# Altium PCB M1-Test-Board.PcbDoc (part 2 of 5)
Units mil, origin at the board's own origin, x right, y up, seen from the top; angles counter-clockwise.
Board outline 3977 x 5000 mil, 4 copper layers (Top, GND Layer 2, Power Layer 3, Bottom), stack 60 mil thick; 191 components, 124 nets, 579 pads, 189 vias.
Unrouted connection lines stored in the file: 80.
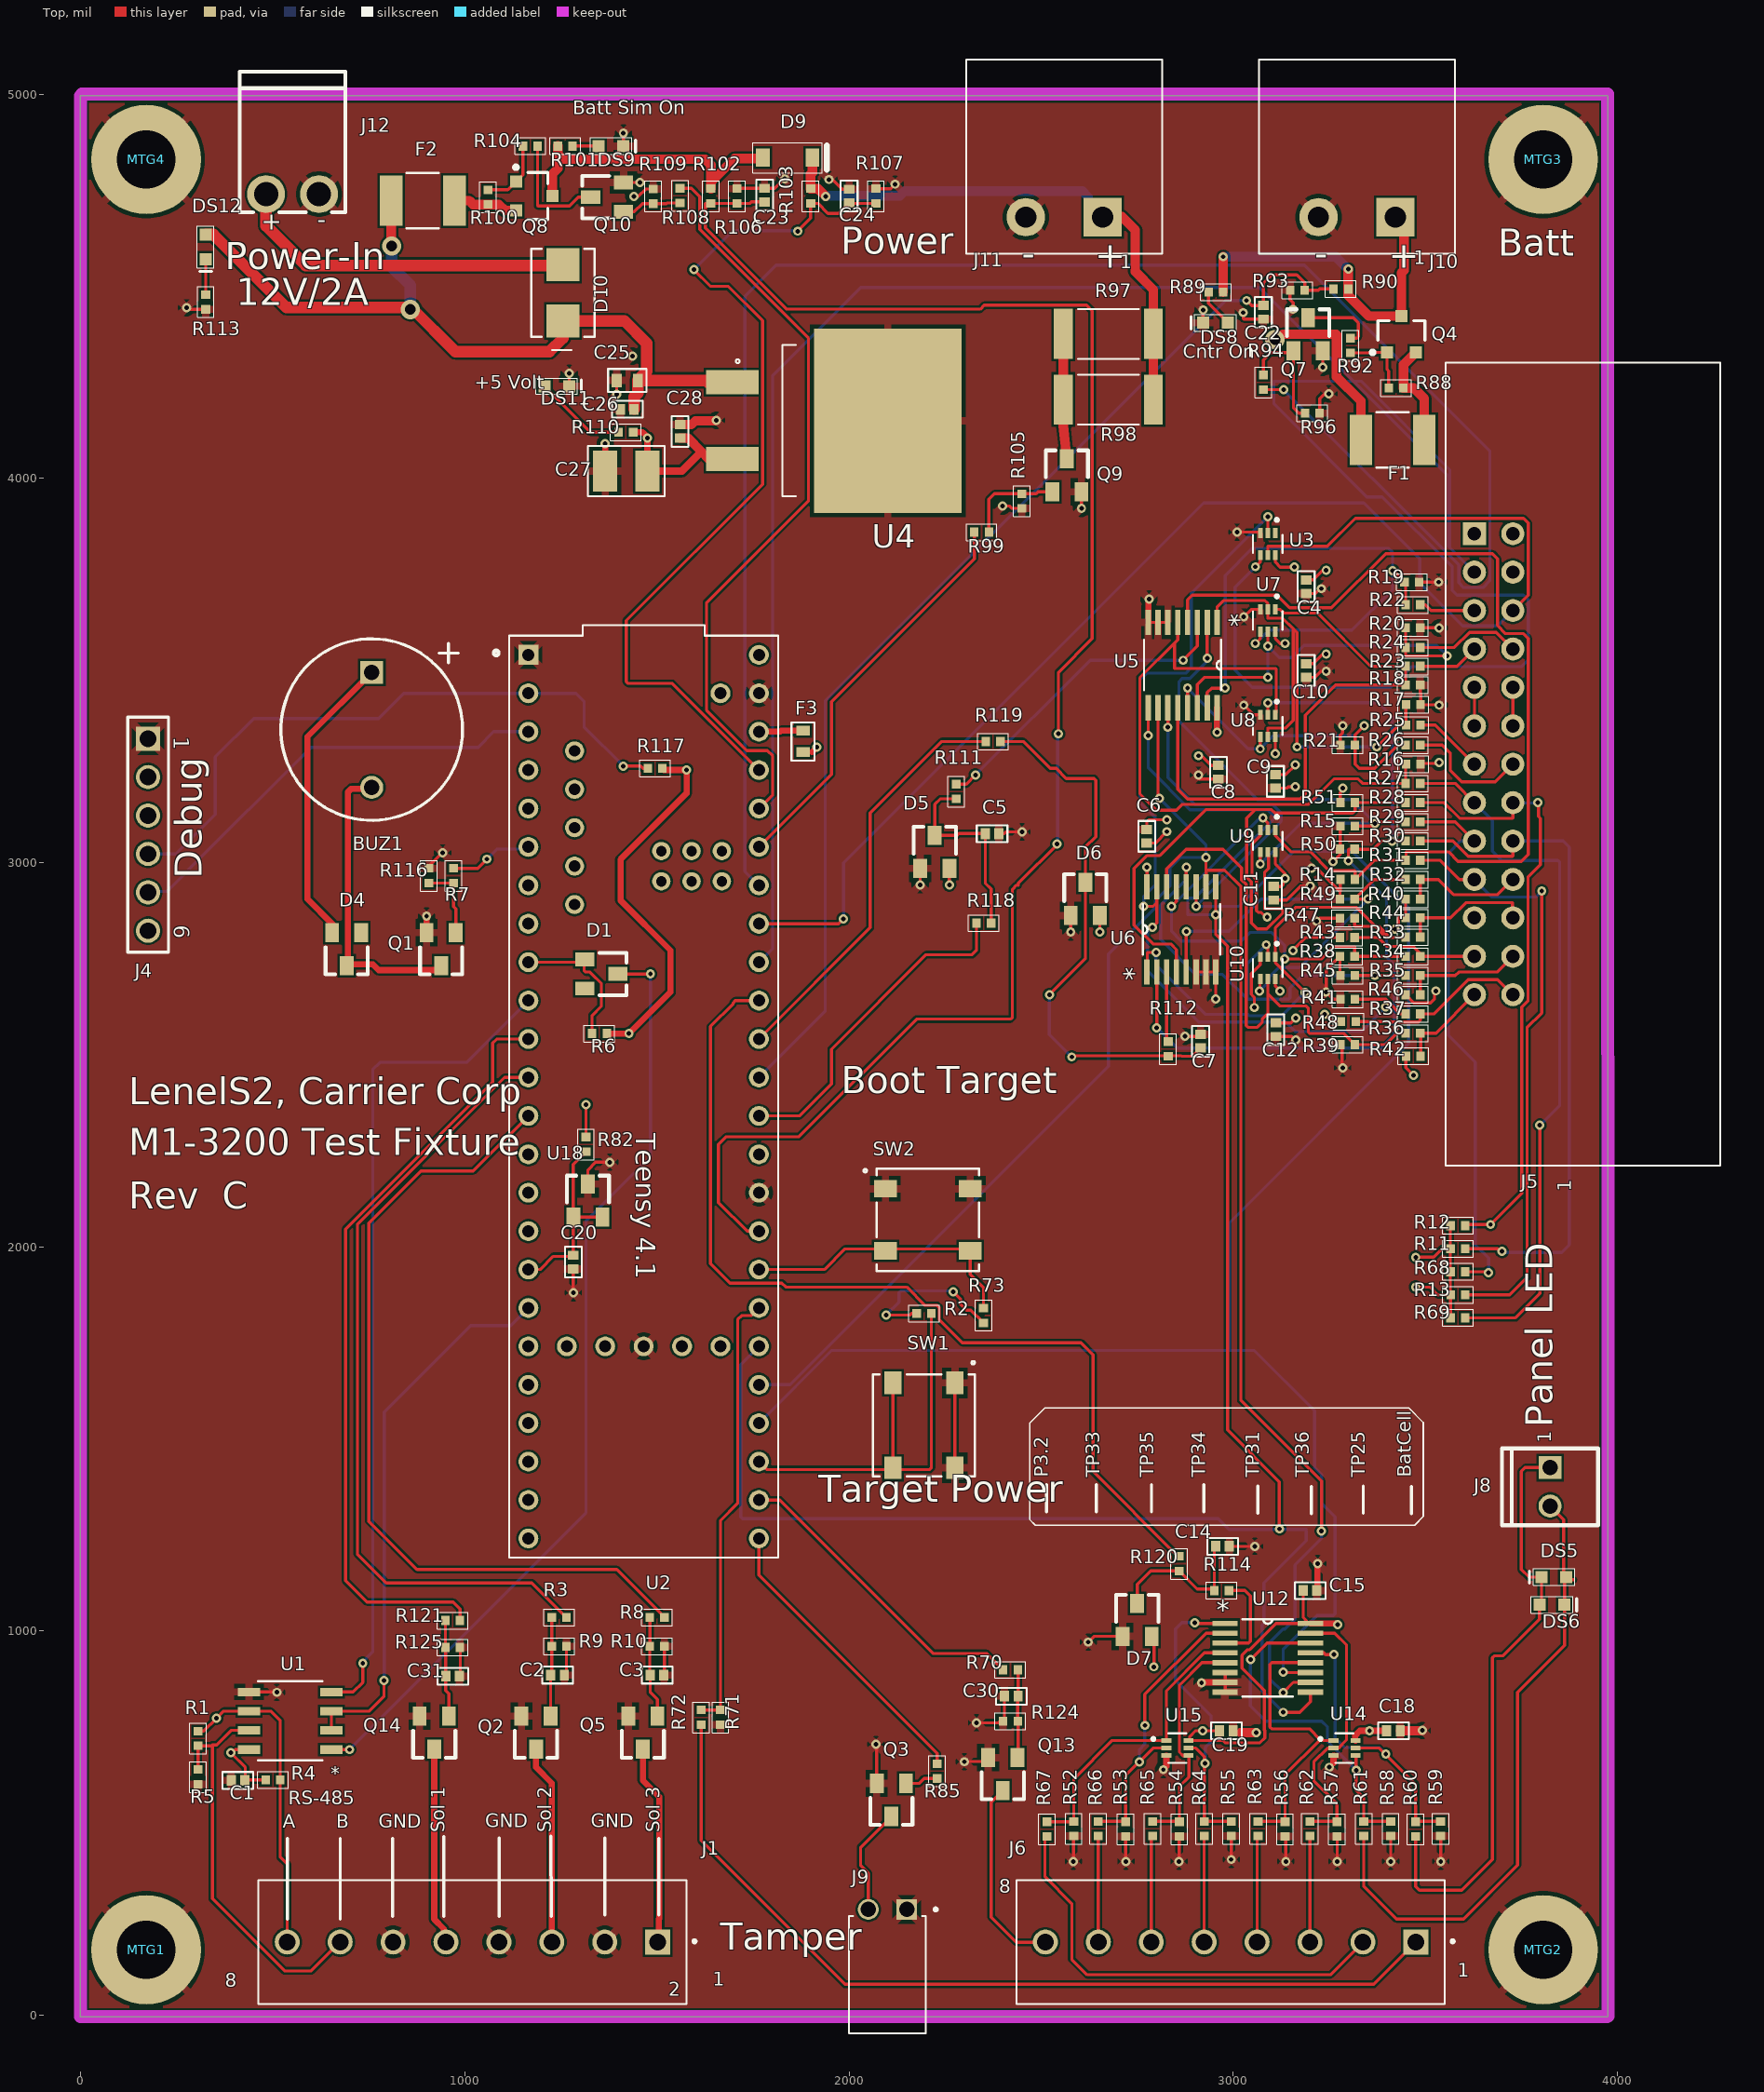
[diagram p0: Top view]

## Part data (continued)
J1 J6: library part CON-0011, "Conn Terminal Block F 8 POS 3.5mm Solder ST T", Color=Green, LCSC Part Number=N/A, Manufacturer="TE Connectivity", Package=None, Supplier Part Number 1=571-284391-8, Category="Terminal Blocks", Contact Material=Brass, Contact Plating=Tin, Digi-Key_Part_Number=A98163-ND, Digi-Key_Purchase_URL=https://www.digikey.com.au/product-detail/en/te-connectivity-amp-connectors/284391-8/A98163-ND/1827025?utm_source=snapeda&utm_medium=aggregator&utm_campaign=symbol, EU_RoHS_Compliance="Compliant with Exemptions", Manufacturer Part Number=284391-8, MF="TE Connectivity", Mount="Through Hole", MP=284391-8, Part Name=CON-0011, Pricing 1="1=5.54000, 10=3.52000, 50=3.52000, 100=3.4300", RoHS=Yes, SnapEDA_Link=https://www.snapeda.com/parts/284391-8/TE%20Connectivity%20AMP%20Connectors/view-part/2375722/?ref=snap, Stock 1=530, Supplier 1=Mouser, TE_purchase_URL=https://www.te.com/usa-en/product-284391-8.html?te_bu=Cor&te_type=disp&te_campaign=seda_glo_cor-seda-global-disp-prtnr-fy19-seda-model-bom-cta_sma-317_1&elqCampaignId=32493
J4: library part CON-0003, "CONN HEADER 6 POS 2.54", Color=Black, LCSC Part Number=C2833331, Manufacturer="Wurth Electronics", Max Operating Temperature=125°C, Min Operating Temperature=-40°C, Supplier Part Number 1=732-5319-ND, Category="Headers and Wire Housings", Contact Material="Copper Alloy,Copper", Contact Plating=Gold, Housing Material=PBT, Manufacturer Part Number=61300611121, Mount="Through Hole", Number of Rows=1, Part Name=CON-0003, Pricing 1="1=0.35000, 10=0.29800, 25=0.24720, 50=0.20700", RoHS=Yes, Stock 1=57047, Supplier 1=Digi-Key
J5: library part CON-0010, "3000 Series; 2.54mm Pitch 26 Way 2 Row Right", Color=Black, Current=12A, Current Rating=1A, Flammability Rating="UL94 V-0", LCSC Part Number=N/A, Manufacturer=3M, Max Current Rating=2A, Max Operating Temperature=105°C, Max Supply Voltage (AC)=300V, Min Operating Temperature=-55°C, Package Quantity=250, Supplier Part Number 1=MHR26S-ND, ATTR="CONN HEADER LATCH/EJEC  RTA DUAL ROW 26POS", Category="Headers and Wire Housings", Closed End="No (Without)", ComponentLink1Description=https://datasheet.ciiva.com/19461/1578947-194, ComponentLink1URL=https://datasheet.ciiva.com/19461/1578947-194, ComponentLink2Description=https://datasheet.ciiva.com/11754/0900766b807, ComponentLink2URL=https://datasheet.ciiva.com/11754/0900766b807, ComponentLink3Description=https://datasheet.ciiva.com/719/ts0772-719341, ComponentLink3URL=https://datasheet.ciiva.com/719/ts0772-719341, ComponentLink4Description=https://datasheet.ciiva.com/8051/ts0772-80510, ComponentLink4URL=https://datasheet.ciiva.com/8051/ts0772-80510, ComponentLink5Description=https://datasheet.ciiva.com/30156/eng-cs-1308, ComponentLink5URL=https://datasheet.ciiva.com/30156/eng-cs-1308, ComponentLink6Description=https://datasheet.ciiva.com/3141/eng-cs-13083, ComponentLink6URL=https://datasheet.ciiva.com/3141/eng-cs-13083, ComponentLink7Description=https://datasheet.ciiva.com/823/eng-cd-284391, ComponentLink7URL=https://datasheet.ciiva.com/823/eng-cd-284391, Connector Type="Male Pin", Contact Material="Copper Alloy,Copper", Contact Mating Length=0.24inch, Contact Plating=Gold, Contact Type="Male Pin", Depth=24.6mm, ELV=Compliant, Fastening Type=Latch, Gender=Male, Height=8.6mm, Housing Color=Black, Housing Material=Polychlorinated, Interlock="Yes (With)", Lead Free="Lead Free", Length=52.45mm, Manufacturer Part Number=N3429-5202RB, Max Voltage Rating (AC)=300V, Mount="Through Hole", Number of Circuits=8, Number of Contacts=26, Number of Levels=1, Number of Positions=26, Number of Positions Per Level=8, Number of Rows=2, Orientation="Right Angle", Packaging=Bulk, Part Name=CON-0010, Pitch=2.54mm, PKG=2M54_13x2_TH_LATCH, Plating=Brass, Pricing 1="1=5.34000, 10=4.85100, 100=4.27430, 500=3.633", Radiation Hardening=No, REACH SVHC="No SVHC", RoHS=Yes, RoHS Compliant=Yes, Row Spacing=0.1inch, Screw Flange="No (Without)", Screwless Terminal Block="No (Without)", Series=3000, Shrouded="Yes (With)", Side Stackable="Yes (With)", Stock 1=185, Supplier 1=Digi-Key, Tail Length=3.5mm, Termination=Solder, Thread Size=M2, Voltage=300V, Voltage Rating=300V, Wire Gauge (Max)=30AWG, Wire Gauge (Min)=30AWG
J8: library part CON-0013, "Header, Polarized; MTA-100; 2; 250 VAC; Polye", Color=Natural,White,Beige, Housing Color=Natural, LCSC Part Number=C86501, Manufacturer="TE Connectivity", Supplier Part Number 1=A19423-ND, Category=Connectors, Contact Material="Copper Alloy", Contact Plating=Tin, Contact Shape=Square, Housing Material=Polyester, Manufacturer Part Number=640454-2, Mount="Through Hole", Parameter 1=C86502, Part Name=CON-0013, Pricing 1="1=0.16000, 10=0.12600, 100=0.09280, 500=0.076", RoHS=Yes, Stock 1=22525, Supplier 1=Digi-Key
J9: library part CON-0014, "MTA-100 HEADER  Friction Lock R/A 2POS 2.54MM", LCSC Part Number=C86507, Manufacturer="AMP - TE CONNECTIVITY", Supplier Part Number 1=A1926-ND, ComponentLink1Description=http://www.farnell.com/datasheets/2007196.pdf, ComponentLink1URL=http://www.farnell.com/datasheets/2007196.pdf, ComponentLink2Description=http://www.farnell.com/datasheets/2007196.pdf, ComponentLink2URL=http://www.farnell.com/datasheets/2007196.pdf, ComponentLink3Description=http://www.farnell.com/datasheets/2007196.pdf, ComponentLink3URL=http://www.farnell.com/datasheets/2007196.pdf, Manufacturer Part Number=640457-2, Parameter 1=C86502, Part Name=CON-0014, RoHS=No, Supplier 1=Digi-Key
J10: library part CON-0006, "Pluggable Term Blocks BCH-508HS- 2 GN 5.08", Current=13.5A, Flammability Rating="UL94 V-0", Housing Color=Green, LCSC Part Number=N/A, Manufacturer="Phoenix Contact", Manufacturer Part Number=5442002, Package Quantity=50, Supplier Part Number 1=277-11311-ND, Voltage=300V, Voltage Rating=200V, Approvals=UL,CSA,cULus,CB,EAC, ATTR="HEADER TERM BLK 5.08MM 2POS RTA GRAY", Category="Terminal Blocks", ComponentLink1Description=https://datasheet.ciiva.com/16046/1751251-160, ComponentLink1URL=https://datasheet.ciiva.com/16046/1751251-160, ComponentLink2Description=https://datasheet.ciiva.com/6745/1751251-6745, ComponentLink2URL=https://datasheet.ciiva.com/6745/1751251-6745, ComponentLink3Description=https://datasheet.ciiva.com/29226/774163-da-0, ComponentLink3URL=https://datasheet.ciiva.com/29226/774163-da-0, Connector Type=Screw, Contact Material=Tin, Current Rating=13.5A, Gender=Male, Height=11mm, Insulation Material=Nylon, Lead Free="Lead Free", Length=7.3mm, Material=Polyamide, Max Current Rating=13.5A, Mount="Through Hole", Number of Circuits=3, Number of Contacts=3, Number of Levels=1, Number of Poles=3, Number of Positions=3, Number of Positions Per Level=3, Number of Rows=1, Orientation=Straight, Packaging=Bulk, Part Name=CON-0006, Pitch=3.5mm, PKG=TB508HDR02_RTA, Pricing 1="1=0.68000, 10=0.64900, 50=0.63140, 100=0.5900", REACH SVHC=Unknown, RoHS=Yes, RoHS Compliant=Yes, Series="COMBICON MKDS", Stock 1=219, Stripping Length=5mm, Supplier 1=Digi-Key, Termination=Screw, Weight=0.056791oz, Width=12mm, Wire Gauge (Max)=30AWG, Wire Gauge (Min)=16AWG, Wire/Cable Gauge=30AWG
J11: library part CON-0005, "Pluggable Term Blocks BCH-508HS- 2 GR 5.08", Color=Grey, Current Rating=12A, LCSC Part Number=N/A, Manufacturer="Phoenix Contact", Manufacturer Part Number=5433668, Package Quantity=100, Supplier Part Number 1=277-11218-ND, Voltage Rating=320V, ATTR="HEADER TERM BLK 5.08MM 2POS RTA GREEN", Category="Terminal Blocks", Contact Plating=Tin, Mount="Through Hole", Number of Levels=1, Number of Positions Per Level=2, Packaging=Bulk, Part Name=CON-0005, PKG=TB508HDR02_RTA, Pricing 1="1=0.69000, 10=0.66000, 50=0.64200, 100=0.6000", RoHS=Yes, Stock 1=100, Supplier 1=Digi-Key, Termination=Solder
J12: library part CON-0001, "Conn Header Right angle 3.5 pitch 2P", Color=Black, LCSC Part Number=C409115, Manufacturer="Adam Equipment", Package Quantity=1, Supplier Part Number 1=2057-EBSA-02-A-ND, Category=Connectors, ComponentLink1Description=https://datasheet.ciiva.com/741/xrxczzzsxxn-r, ComponentLink1URL=https://datasheet.ciiva.com/741/xrxczzzsxxn-r, Connector Type="Male Pin", Contact Mating Length=0.318inch, Contact Plating=Gold, Contact Type="Male Pin", Manufacturer Part Number=EBSA-02-A, Mount="Through Hole", Number of Positions=6, Number of Rows=1, Packaging=Bulk, Part Name=CON-0001, Pitch=0.1inch, Pricing 1="1=0.58000, 10=0.31600, 25=0.23600, 50=0.21040", Pricing 2="1=0.21000, 10=0.19800, 25=0.16920, 50=0.14820", RoHS=Yes, RoHS Compliant=Yes, Series=-, Stock 1=2090, Stock 2=1241, Supplier 1=Digi-Key, Supplier 2=Digi-Key, Supplier Part Number 2=S1211EC-06-ND, Termination=Solder
MTG1 MTG2 MTG3 MTG4: library part Hole-001, "Plated", Part Name=Hole-001
Q1 Q2 Q3 Q5 Q7 Q9 Q10 Q13 Q14: library part Tran-0002, "Trans GP BJT NPN 60V 0.2A 350mW Automotive 3-Pin SOT-23 T/R", Case/Package=SOT-23-3, Collector-emitter Voltage-Max=400mV, Frequency=250MHz, LCSC Part Number=C20526, Manufacturer="ON Semiconductor / Fairchild", Max Collector Current=200mA, Max Operating Temperature=150°C, Min Operating Temperature=-55°C, Package Description="3-Pin Small Outline Transistor, Body 2.9 x 1.3 mm, Pitch 0.95 mm", Package Reference="SOT-23 (318-08)", Power=225mW, Supplier Part Number 1=58K9431, Component Type=Transistors, ComponentLink1Description=https://datasheet.ciiva.com/22664/1708270-226, ComponentLink1URL=https://datasheet.ciiva.com/22664/1708270-226, ComponentLink2Description=https://datasheet.ciiva.com/4721/mmbt3906lt1-, ComponentLink2URL=https://datasheet.ciiva.com/4721/mmbt3906lt1-, ComponentLink3Description=https://datasheet.ciiva.com/11201/mmbt3906lt1, ComponentLink3URL=https://datasheet.ciiva.com/11201/mmbt3906lt1, ComponentLink4Description=https://datasheet.ciiva.com/16387/mmbt3906lt1, ComponentLink4URL=https://datasheet.ciiva.com/16387/mmbt3906lt1, ComponentLink5Description=https://datasheet.ciiva.com/976/mmbt3906lt1-d, ComponentLink5URL=https://datasheet.ciiva.com/976/mmbt3906lt1-d, ComponentLink6Description=https://datasheet.ciiva.com/976/mmbt3906lt1-d, ComponentLink6URL=https://datasheet.ciiva.com/976/mmbt3906lt1-d, ComponentLink7Description=https://datasheet.ciiva.com/976/mmbt3906lt1-d, ComponentLink7URL=https://datasheet.ciiva.com/976/mmbt3906lt1-d, Datasheet URL=http://www.onsemi.cn/pub_link/Collateral/MMBT3904LT1-D.PDF, Datasheet Version="Rev. 12, 11/2012", Elements=1, Height=0.94mm, Lead Free="Lead Free", Length=2.9mm, Manufacturer Part Number=MMBT3904, Max Frequency=250MHz, Mount="Surface Mount", Mounting Technology=SM, Number of Elements=1, Part Name=Tran-0002, Pins=3, Polarity=NPN, Radiation Hardening=No, REACH SVHC="No SVHC", RoHS=Yes, RoHS Compliant=Yes, Series=-, Supplier 1=Newark, Vce Max=300mV, Width=1.3mm
Q4 Q8: library part Tran-0001, "Mosfet P-channel 30V 4A SOT23-3", Case/Package=SOT-23-3, Collector Base Voltage (VCBO)=60V, Collector Emitter Breakdown Voltage=40V, Collector Emitter Saturation Voltage=300mV, Continuous Drain Current=4A, Current Rating=200mA, Drain to Source Voltage (Vdss)=30V, Emitter Base Voltage (VEBO)=6V, Frequency=300MHz, Frequency (Max)=NotRequiredMHz, Gate-Source Voltage (Max)=?12V, Input Capacitance=645pF, LCSC Part Number=C15127, Manufacturer="Alpha & Omega Semiconductor", Manufacturer Part Number=AO3401AL, Max Operating Temperature=150°C, Max Power Dissipation=1.4W, Min Operating Temperature=-55°C, Operating Temp Range=-55Cto150C, Operating Temperature Classification=Military, Output Power (Max)=NotRequiredW, Package Description="3-Pin Small Outline Transistor, Body 2.95 x 1.6 mm, Pitch 0.95 mm", Package Quantity=1, Package Reference=SOT-23-3L, Package Type=SOT-23, Power Dissipation=350mW, Power Gain=NotRequireddB, Supplier Part Number 1=AO3401AL-ND, Category=BJTs, Channel Mode=Enhancement, Collector Emitter Voltage (VCEO)=40V, ComponentLink1Description=https://media.digikey.com/pdf/Data%20Sheets/A, ComponentLink1URL=https://media.digikey.com/pdf/Data%20Sheets/A, ComponentLink2Description=https://datasheet.ciiva.com/7972/2n3904-79726, ComponentLink2URL=https://datasheet.ciiva.com/7972/2n3904-79726, ComponentLink3Description=https://datasheet.ciiva.com/22653/1922793-226, ComponentLink3URL=https://datasheet.ciiva.com/22653/1922793-226, ComponentLink4Description=https://datasheet.ciiva.com/11201/mmbt3904-11, ComponentLink4URL=https://datasheet.ciiva.com/11201/mmbt3904-11, ComponentLink5Description=https://datasheet.ciiva.com/16850/mmbt3904-16, ComponentLink5URL=https://datasheet.ciiva.com/16850/mmbt3904-16, ComponentLink6Description=https://datasheet.ciiva.com/971/mmbt3904-9718, ComponentLink6URL=https://datasheet.ciiva.com/971/mmbt3904-9718, ComponentLink7Description=https://datasheet.ciiva.com/971/mmbt3904-9718, ComponentLink7URL=https://datasheet.ciiva.com/971/mmbt3904-9718, ComponentLink8Description=https://datasheet.ciiva.com/971/mmbt3904-9718, ComponentLink8URL=https://datasheet.ciiva.com/971/mmbt3904-9718, Contact Plating=Tin,Matte, Continuous Drain Current (ID)=4A, Datasheet URL=http://www.aosmd.com/res/data_sheets/AO3401A.pdf, Datasheet Version="Rev. 3, 03/2011", Drain Current (Max)=4A, Drain Efficiency=NotRequired%, Drain-Source On-Res=0.044ohm, Drain-Source On-Volt=30V, Element Configuration=Single, Gain Bandwidth Product=300MHz, Height=0.25inch, hFE Min=100, Lead Free="Lead Free", Length=0.25inch, Manufacturer URL=http://www.aosmd.com/, Max Breakdown Voltage=40V, Max Collector Current=200mA, Max Frequency=300MHz, Mount="Surface Mount", Mounting=SurfaceMount, Mounting Technology=SurfaceMount, Noise Figure=NotRequireddB, Number of  Elements=1, Number of Elements=1, Number of Pins=3, Package URL=http://www.aosmd.com/res/packaging_information/SOT-23-3L.pdf, Packaging="Tape and Reel", Part Name=Tran-0001, Pin Count=3, Polarity=NPN, Pricing 1="1=0.03200, 10=0.02500, 100=0.01700, 500=0.017", Rad Hardened=No, Radiation Hardening=No, Rds On Max=50mR, REACH SVHC="No SVHC", RoHS=Yes, RoHS Compliant=Yes, Supplier 1=Digi-Key, Termination=SMD/SMT, Transition Frequency=300MHz, Type=PowerMOSFET, Voltage Rating (DC)=40V, Weight=0.03g, Width=0.25inch
R1: library part Res-00013, "Res Thick Film 0402 120 Ohm 1% 0.063W(1/16W) ±100ppm/C Pad SMD Automotive T/R", Case Code (Imperial)=0402, Case Code (Metric)=1005, LCSC Part Number=C25079, Manufacturer="Stackpole Electronics", Manufacturer Part Number=RMCF0402FT120R, Max Operating Temperature=155°C, Max Power Dissipation=63mW, Min Operating Temperature=-55°C, Package Quantity=10000, Resistor Type="Thick Film", Supplier Part Number 1=RMCF0402FT120RCT-ND, Temperature Coefficient=100ppm/°C, Tolerance=1%, Case/Package=0402, Category="Chip SMD Resistors", ComponentLink1Description=http://components.arrow.com/part/dataview/514, ComponentLink1URL=http://components.arrow.com/part/dataview/514, ComponentLink2Description=https://www.seielect.com/catalog/SEI-RMCF_RMC, ComponentLink2URL=https://www.seielect.com/catalog/SEI-RMCF_RMC, ComponentLink3Description=http://www.seielect.com/Catalog/SEI-RMCF_RMCP, ComponentLink3URL=http://www.seielect.com/Catalog/SEI-RMCF_RMCP, ComponentLink4Description=https://www.seielect.com/Catalog/SEI-RMCF_RMC, ComponentLink4URL=https://www.seielect.com/Catalog/SEI-RMCF_RMC, ComponentLink5Description=https://www.seielect.com/catalog/SEI-Packagin, ComponentLink5URL=https://www.seielect.com/catalog/SEI-Packagin, Contact Plating=Tin,Matte, Features="Automotive AEC-Q200", Height=0.016inch, Length=0.039inch, Mount="Surface Mount", Number of Terminations=2, Packaging="Tape and Reel", Part Name=Res-00013, Power Rating=63mW, Pricing 1="1=0.10000, 10=0.01500, 100=0.00610, 1000=0.00", Radiation Hardening=No, Resistance=120R, RoHS=Yes, RoHS Compliant=Yes, Series=RMCF, Stock 1=195943, Supplier 1=Digi-Key, Width=0.02inch